# Altium PCB PCB1.pcbdoc (part 1 of 2)
Units mil, origin at the board's own origin, x right, y up, seen from the top; angles counter-clockwise.
Board outline 2780 x 2060 mil, 2 copper layers (Top Layer, Bottom Layer); 80 components, 64 nets, 301 pads, 176 vias.
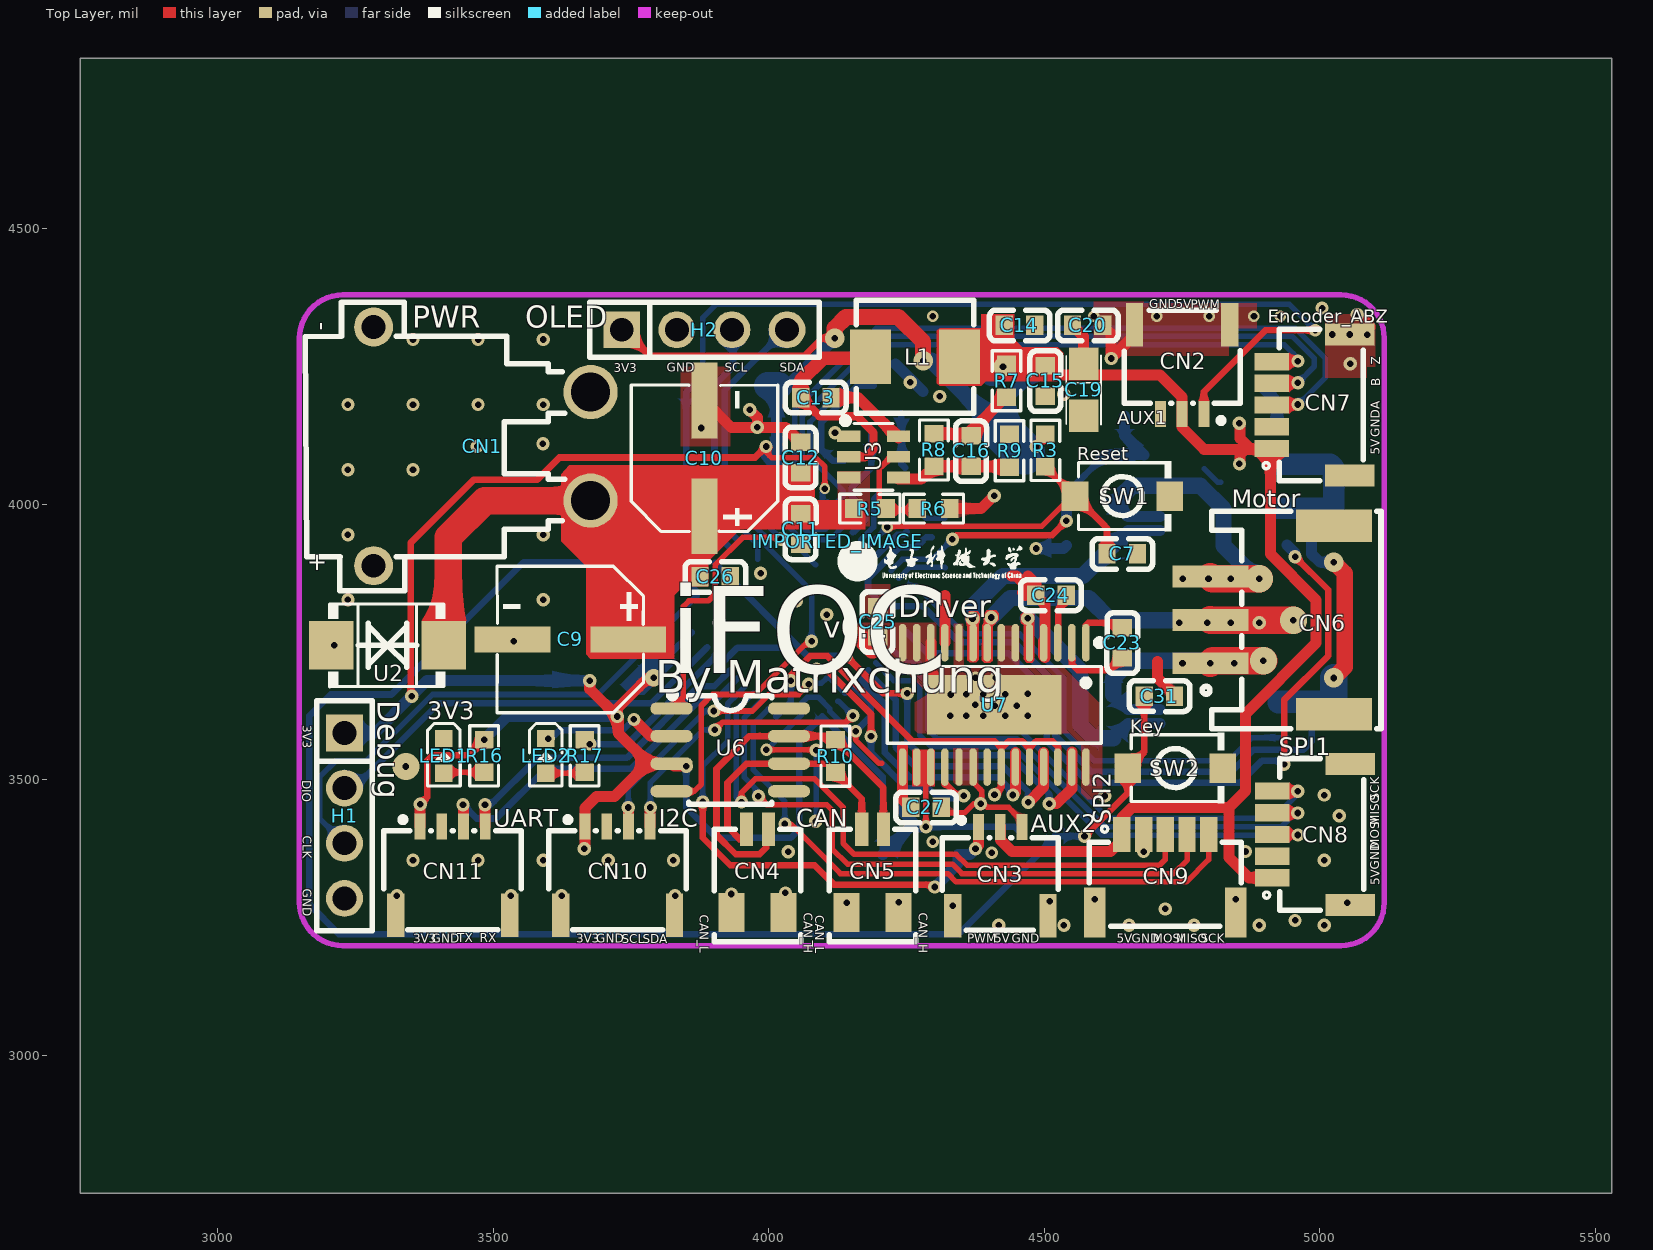
[diagram p0: Top Layer view]
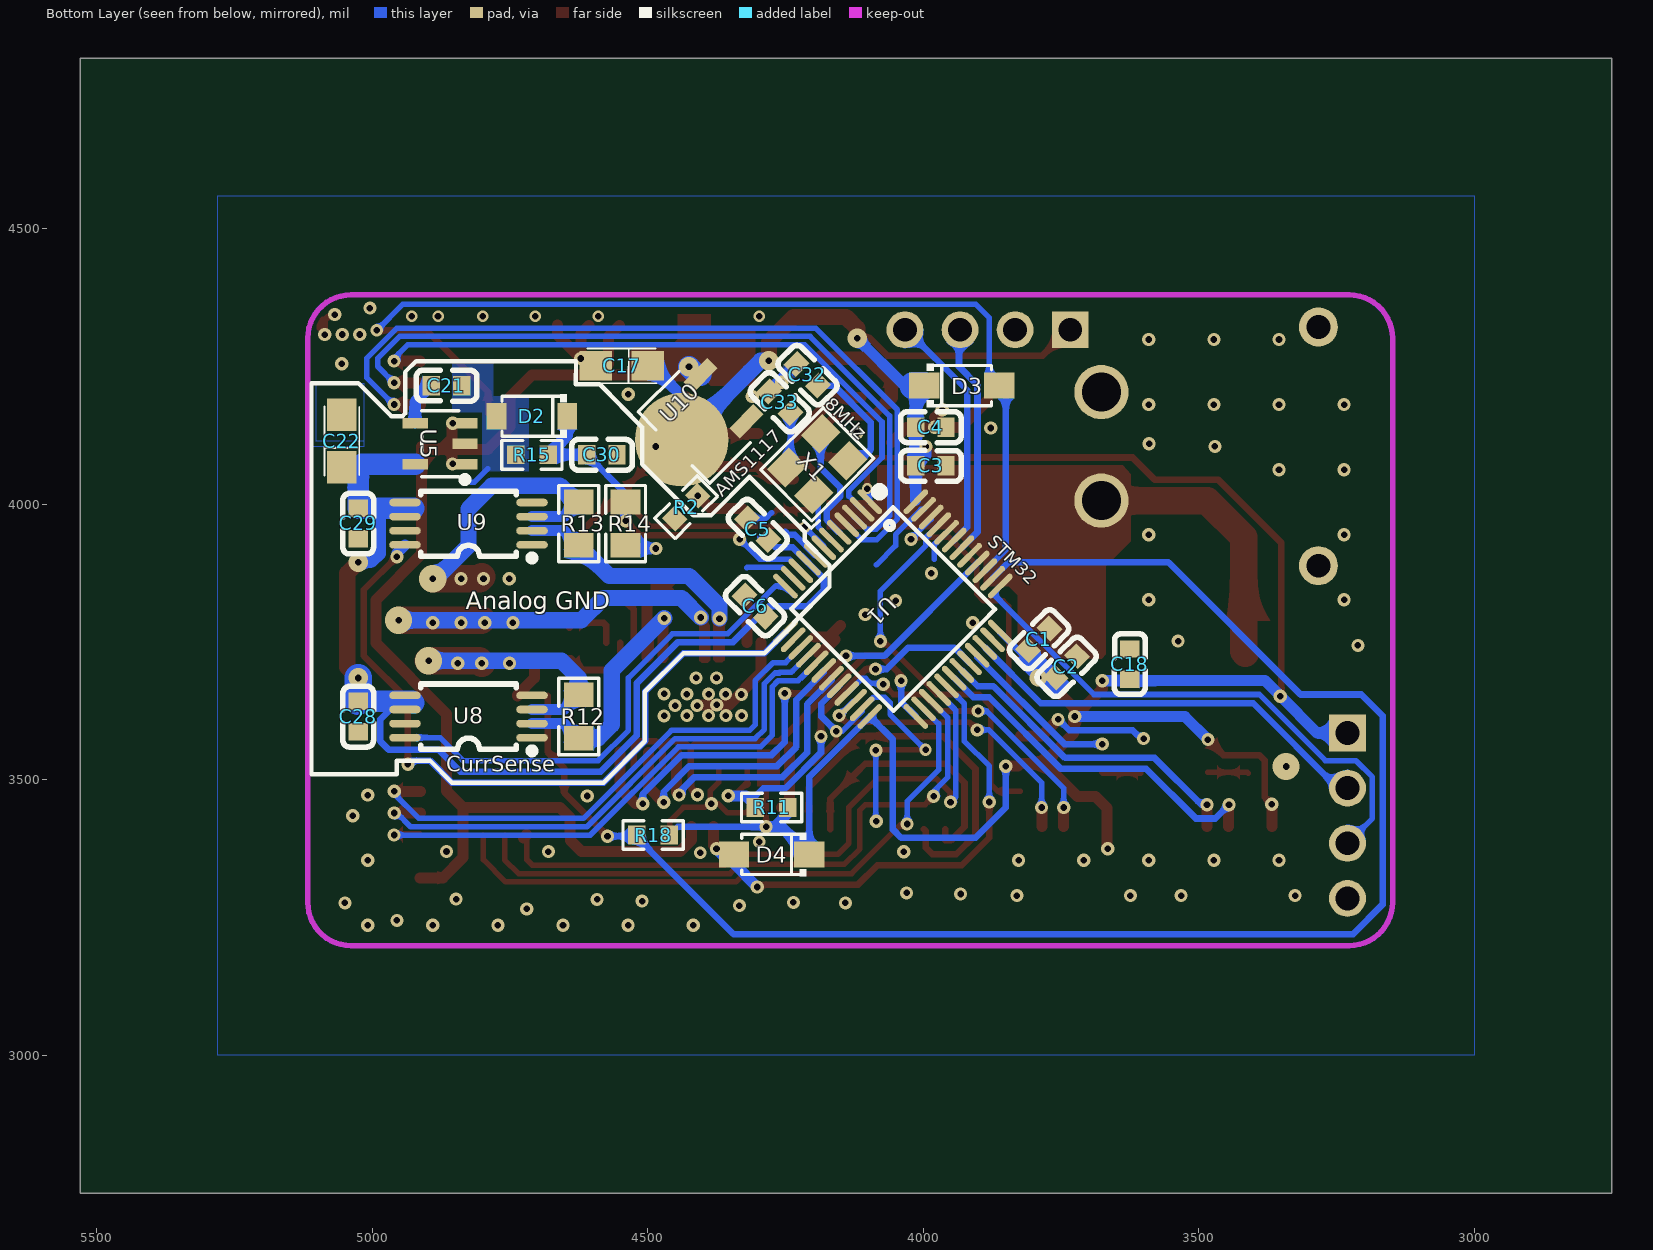
[diagram p1: Bottom Layer view, seen from below]

## Layer stack, top to bottom
Top Layer: signal copper (thickness not stored)
Dielectric: dielectric 12.6, FR-4, Dk 4.8
Bottom Layer: signal copper (thickness not stored)

## Board outline
5530,2750 2750,2750 2750,4810 5530,4810

## Components (designator, comment, footprint, x,y, rotation, side; value= is the part's Value field where it differs from the comment)
C1 "CAP_0603" C0603 3790,3755 r315 bottom
C2 "CAP_0603" C0603 3740,3705 r315 bottom
C3 "CAP_0603" C0603 3986.17,4069.93 r0 bottom
C4 "CAP_0603" C0603 3986.17,4140.13 r0 bottom
C5 "CAP_0603" C0603 4300,3955 r225 bottom
C6 "CAP_0603" C0603 4305,3815 r225 bottom
C7 "CAP_0603" C0603 4641.27,3910 r180 top
C9 "EEEFK1V470P" CAP-SMD_BD6.3-L6.6-W6.6-LS7.6-FD 3639.72,3754.97 r180 top
C10 "EEEFK1V470P" CAP-SMD_BD6.3-L6.6-W6.6-LS7.6-FD 3883.02,4083.56 r90 top
C11 "CAP_0603" C0603 4057.69,3955.26 r90 top
C12 "CAP_0603" C0603 4057.48,4084.89 r270 top
C13 "CAP_0603" C0603 4085.29,4193.87 r0 top
C14 "CAP_0603" C0603 4454.74,4324.69 r180 top
C15 "CAP_0603" C0603 4501.72,4224 r90 top
C16 "CAP_0603" C0603 4367.06,4096.93 r90 top
C17 "TAJA106K010RNJ" CASE-A_3216 4547.08,4251.4 r0 bottom
C18 "CAP_0603" C0603 3625,3710 r270 bottom
C19 "TAJA106K010RNJ" CASE-A_3216 4571.22,4207.76 r270 top
C20 "CAP_0603" C0603 4578.62,4324.69 r180 top
C21 "CAP_0603" C0603 4865,4215.56 r0 bottom
C22 "TAJA105K016RNJ" CASE-A_3216 5055,4115 r90 bottom
C23 "0603B103K101NT" C0603 4641.69,3748.67 r90 top
C24 "CAP_0603" C0603 4512,3835 r0 top
C25 "CAP_0603" C0603 4197.2,3786.86 r90 top
C26 "CAP_0603" C0603 3902.71,3868.35 r180 top
C27 "CAP_0603" C0603 4285,3450 r180 top
C28 "CAP_0603" C0603 5025,3615 r90 bottom
C29 "CAP_0603" C0603 5025,3965.3 r90 bottom
C30 "CAP_0603" C0603 4583.02,4090.11 r0 bottom
C31 "CAP_0603" C0603 4708.61,3652.21 r180 top
C32 "CAP_0603" C0603 4210,4235 r45 bottom
C33 "CAP_0603" C0603 4260,4185 r225 bottom
CN1 "XT30PW-M" CONN-TH_XT30PW-M 3479.66,4105.26 r270 top
CN2 "HDGC1002WR-S-3P" CONN-SMD_3P-P1.00_HDGC_HDGC1002WR-S-3P 4750,4245 r180 top
CN3 "HDGC1002WR-S-3P" CONN-SMD_3P-P1.00_HDGC_HDGC1002WR-S-3P 4420.03,3333.93 r0 top
CN4 "A1002WR-S-2P" CONN-SMD_A1002WR-S-2P 3979.34,3335 r0 top
CN5 "A1002WR-S-2P" CONN-SMD_A1002WR-S-2P 4188.21,3335 r0 top
CN6 "ZX-PH2.0-WT3P" CONN-SMD_3P-P2.00_ZX-PH2.0-WT3P 4913.27,3790.26 r90 top
CN7 "ZX-SH1.0-5PWT" CONN-SMD_5P-P1.00_SHOU-HAN_1.0-5P-WT 4983.27,4180.26 r90 top
CN8 "ZX-SH1.0-5PWT" CONN-SMD_5P-P1.00_SHOU-HAN_1.0-5P-WT 4984.1,3401.07 r90 top
CN9 "ZX-SH1.0-5PWT" CONN-SMD_5P-P1.00_SHOU-HAN_1.0-5P-WT 4719.36,3330 r0 top
CN10 "HDGC1002WR-S-4P" CONN-SMD_4P-P1.00_HDGC_HDGC1002WR-S-4P 3725.56,3335 r0 top
CN11 "HDGC1002WR-S-4P" CONN-SMD_4P-P1.00_HDGC_HDGC1002WR-S-4P 3426.19,3335 r0 top
D2 "BZT52C3V3_C173413" SOD-123_L2.7-W1.6-LS3.7-RD 4710,4160 r0 bottom
D3 "1N4007_C727082" SOD-123FL_L2.7-W1.8-LS3.8-RD 3930,4215.45 r180 bottom
D4 "1N4007_C727082" SOD-123FL_L2.7-W1.8-LS3.8-RD 4275,3365 r0 bottom
H1 "PM254V-11-04-H85" HDR-TH_4P-P2.54-V-F 3230,3435 r270 top
H2 "PM254V-11-04-H85" HDR-TH_4P-P2.54-V-F 3883.02,4316.78 r0 top
IMPORTED_IMAGE "IMPORTED_IMAGE" IMPORTED_IMAGE 4124.76,3932.92 r0 top
L1 "FXL0530-100-M" IND-SMD_L5.4-W5.2_FXL0530 4265.25,4268.04 r0 top
LED1 "NCD0603B1" LED0603-RD 3410,3543.69 r270 top
LED2 "NCD0603R1_C84263" LED0603-RD_RED 3595,3543.69 r270 top
R2 "Res_0603" R0603 4430,3995 r315 bottom
R3 "Res_0603" R0603 4501.61,4097.88 r270 top
R5 "Res_0603" R0603 4183.32,3992.37 r180 top
R6 "Res_0603" R0603 4298.77,3992.37 r180 top
R7 "Res_0603" R0603 4431.32,4224.27 r90 top
R8 "Res_0603" R0603 4299.47,4098.72 r90 top
R9 "Res_0603" R0603 4436.77,4097.15 r270 top
R10 "Res_0603" R0603 4120.77,3543.31 r270 top
R11 "Res_0603" R0603 4275,3450 r180 bottom
R12 "0805W4F100MT5E" R0805 4625,3615 r270 bottom
R13 "0805W4F100MT5E" R0805 4625,3965 r270 bottom
R14 "HoLTT0805-1/8W-100K-5%" R0805 4540,3965 r270 bottom
R15 "HoLTT0603-1/10W-10K-1%" R0603 4710,4090 r180 bottom
R16 "Res_0603" R0603 3483.46,3543.49 r270 top
R17 "Res_0603" R0603 3665.78,3543.49 r270 top
R18 "Res_0603" R0603 4490,3400 r0 bottom
SW1 "TS-1088-AR02016" SW-SMD_L3.9-W3.0-P4.45 4641.58,4015 r0 top
SW2 "TS-1088-AR02016" SW-SMD_L3.9-W3.0-P4.45 4737.4,3521.5 r0 top
U1 "STM32F103CBT6" LQFP-48_L7.0-W7.0-P0.50-LS9.0-BL 4055,3810 r315 bottom
U2 "SMBJ24CA_C3001981" SMB_L4.3-W3.6-LS5.4-BI 3308.22,3744.31 r180 top
U3 "TPS54302DDCR" SOT-23-6_L2.9-W1.6-P0.95-LS2.8-BL 4190.11,4086.17 r270 top
U5 "SPX3819M5-L-3-3/TR" SOT-23-5_L3.0-W1.7-P0.95-LS2.8-BL 4876.49,4110 r90 bottom
U6 "SN65HVD232DR" SOIC-8_L5.0-W4.0-P1.27-LS6.0-BL 3930,3554.49 r270 top
U7 "DRV8313PWPR" HTSSOP-28_L9.8-W4.5-P0.65-LS6.6-BL-EP 4409.01,3636.19 r180 top
U8 "INA240A2PWR" TSSOP-8_L4.4-W3.0-P0.65-LS6.4-BL 4825,3615 r90 bottom
U9 "INA240A2PWR" TSSOP-8_L4.4-W3.0-P0.65-LS6.4-BL 4825,3965 r90 bottom
U10 "AMS1117-3.3_C347256" SOT-89_L4.5-W2.5-P1.50-LS4.2-BR 4400,4155 r135 bottom
X1 "TAXM8M4RDBCCT2T" OSC-SMD_4P-L3.2-W2.5-BL 4192.08,4073.08 r135 bottom

## Footprints (in the part's own frame and the unit in brackets; to place one, negate y for a bottom-side part, rotate by r counter-clockwise, add the part's x,y. Pads: shape width x height; smd on the part's side, far side on the other; paste and mask are expansions set on the pad)
C0603 [mm]
  rect 0.8x0.9 smd: 1(-0.7,0) 2(0.7,0)
  silkscreen extent -1.41,-0.71 1.39,0.72
CAP-SMD_BD6.3-L6.6-W6.6-LS7.6-FD [mm]
  rect 3.5x1.2 smd: 1(-2.67,0) 2(2.67,0)
  silkscreen extent -3.38,-3.38 3.38,3.38
CASE-A_3216 [mil]
  rect 59.05x53.5 smd: 1(-47.24,0) 2(47.24,0)
  silkscreen extent -63,-32 63,32
CONN-SMD_3P-P1.00_HDGC_HDGC1002WR-S-3P [mm]
  rect 0.5x1.2 smd: 1(-1,2.05) 2(0,2.05) 3(1,2.05)
  rect 0.8x2 smd: 4(2.2,-2.05) 5(-2.2,-2.05)
  silkscreen extent -2.67,-2.72 2.67,2.48
CONN-SMD_3P-P2.00_ZX-PH2.0-WT3P [mm]
  rect 1x3.5 smd: 1(-2,2.85) 2(0,2.85) 3(2,2.85)
  rect 1.5x3.5 smd: 4(4.35,-2.85) 5(-4.35,-2.85)
  silkscreen extent -5.02,-5.02 5.02,3.23
CONN-SMD_4P-P1.00_HDGC_HDGC1002WR-S-4P [mm]
  rect 0.5x1.2 smd: 1(-1.5,2.05) 2(-0.5,2.05) 3(0.5,2.05) 4(1.5,2.05)
  rect 0.8x2 smd: 5(2.625,-2.05) 6(-2.625,-2.05)
  silkscreen extent -3.18,-2.72 3.17,2.48
CONN-SMD_5P-P1.00_SHOU-HAN_1.0-5P-WT [mm]
  rect 0.8x1.6 smd: 1(-2,1.8) 2(-1,1.8) 3(0,1.8) 4(1,1.8) 5(2,1.8)
  rect 1x2.3 smd: 6(3.25,-1.8) 7(-3.25,-1.8)
  silkscreen extent -3.5,-2.43 3.5,2.2
CONN-SMD_A1002WR-S-2P [mm]
  rect 0.6x1.55 smd: 1(-0.498,1.924) 2(0.501,1.924)
  rect 1.2x1.8 smd: 3(1.201,-1.924) 4(-1.201,-1.924)
  silkscreen extent -2,-3.27 2,1.92
CONN-TH_XT30PW-M [mm]
  round 2.5 hole 1.8: 1(-2.5,5) 2(2.5,5)
  round 1.8 hole 1.1: 3(5.5,-5) 4(-5.5,-5)
  silkscreen extent -6.65,-8.15 6.65,3.81
HDR-TH_4P-P2.54-V-F [mm]
  rect 1.7x1.7 hole 1.1: 1(-3.81,0)
  round 1.7 hole 1.1: 2(-1.27,0) 3(1.27,0) 4(3.81,0)
  silkscreen extent -5.29,-1.27 5.29,1.27
HTSSOP-28_L9.8-W4.5-P0.65-LS6.6-BL-EP [mm]
  oval 0.343x1.731 smd: 1(-4.225,-2.866) 2(-3.575,-2.866) 3(-2.925,-2.866) 4(-2.275,-2.866) 5(-1.625,-2.866) 6(-0.975,-2.866) 7(-0.325,-2.866) 8(0.325,-2.866) 9(0.975,-2.866) 10(1.625,-2.866) 11(2.275,-2.866) 12(2.925,-2.866) 13(3.575,-2.866) 14(4.225,-2.866) 15(4.225,2.866) 16(3.575,2.866) 17(2.925,2.866) 18(2.275,2.866) 19(1.625,2.866) 20(0.975,2.866) 21(0.325,2.866) 22(-0.325,2.866) 23(-0.975,2.866) 24(-1.625,2.866) 25(-2.275,2.866) 26(-2.925,2.866) 27(-3.575,2.866) 28(-4.225,2.866)
  rect 6.2x2.75 smd: 29(0,0)
  silkscreen extent -5,-3.02 4.93,1.77
IMPORTED_IMAGE [mil]
  silkscreen extent 0,-72 335,0
IND-SMD_L5.4-W5.2_FXL0530 [mm]
  rect 1.9x2.5 smd: 1(-2.05,0) 2(2.05,0)
  silkscreen extent -2.7,-2.6 2.7,2.6
LED0603-RD [mm]
  rect 0.8x0.8 smd: 1(-0.799,-0.003) 2(0.799,0.003)
  silkscreen extent -1.49,-0.75 1.39,0.76
LED0603-RD_RED [mm]
  rect 0.8x0.8 smd: 1(-0.8,-0.003) 2(0.8,0.003)
  silkscreen extent -1.49,-0.75 1.39,0.76
LQFP-48_L7.0-W7.0-P0.50-LS9.0-BL [mm]
  oval 0.27x1.5 smd: 1(-2.75,-4.25) 2(-2.25,-4.25) 3(-1.75,-4.25) 4(-1.25,-4.25) 5(-0.75,-4.25) 6(-0.25,-4.25) 7(0.25,-4.25) 8(0.75,-4.25) 9(1.25,-4.25) 10(1.75,-4.25) 11(2.25,-4.25) 12(2.75,-4.25) 25(2.75,4.25) 26(2.25,4.25) 27(1.75,4.25) 28(1.25,4.25) 29(0.75,4.25) 30(0.25,4.25) 31(-0.25,4.25) 32(-0.75,4.25) 33(-1.25,4.25) 34(-1.75,4.25) 35(-2.25,4.25) 36(-2.75,4.25)
  oval 1.5x0.27 smd: 13(4.25,-2.75) 14(4.25,-2.25) 15(4.25,-1.75) 16(4.25,-1.25) 17(4.25,-0.75) 18(4.25,-0.25) 19(4.25,0.25) 20(4.25,0.75) 21(4.25,1.25) 22(4.25,1.75) 23(4.25,2.25) 24(4.25,2.75) 37(-4.25,2.75) 38(-4.25,2.25) 39(-4.25,1.75) 40(-4.25,1.25) 41(-4.25,0.75) 42(-4.25,0.25) 43(-4.25,-0.25) 44(-4.25,-0.75) 45(-4.25,-1.25) 46(-4.25,-1.75) 47(-4.25,-2.25) 48(-4.25,-2.75)
  silkscreen extent -3.59,-4.46 3.3,3.34
OSC-SMD_4P-L3.2-W2.5-BL [mm]
  rect 1.4x1.2 smd: 1(-1.1,-0.875) 2(1.1,-0.875) 3(1.1,0.875) 4(-1.1,0.875)
  silkscreen extent -2.29,-1.9 2.03,1.65
R0603 [mil]
  rect 31.75x34.02 smd: 1(-29.66,0) 2(29.66,0)
  silkscreen extent -55,-26 55,26
R0805 [mm]
  rect 1.133x1.377 smd: 1(-1,0) 2(1,0)
  silkscreen extent -1.76,-0.92 1.76,0.92
SMB_L4.3-W3.6-LS5.4-BI [mil]
  rect 80.61x88.23 smd: 1(-102.02,0) 2(102.02,0)
  silkscreen extent -105,-75 108,75
SOD-123_L2.7-W1.6-LS3.7-RD [mm]
  rect 0.91x1.22 smd: 1(-1.635,0) 2(1.635,0)
  silkscreen extent -1.6,-1 1.38,1
SOD-123FL_L2.7-W1.8-LS3.8-RD [mm]
  rect 1.4x1.2 smd: 1(-1.735,0) 2(1.735,0)
  silkscreen extent -1.6,-1 1.38,1
SOIC-8_L5.0-W4.0-P1.27-LS6.0-BL [mil]
  oval 22.38x76.78 smd: 1(-75,-106.5) 2(-25,-106.5) 3(25,-106.5) 4(75,-106.5) 5(75,106.5) 6(25,106.5) 7(-25,106.5) 8(-75,106.5)
  silkscreen extent -106,-111 98,75
SOT-23-5_L3.0-W1.7-P0.95-LS2.8-BL [mm]
  rect 0.49x1.157 smd: 1(-0.95,-1.154) 2(0,-1.154) 3(0.95,-1.154)
  rect 0.49x1.175 smd: 4(0.95,1.154) 5(-0.95,1.154)
  silkscreen extent -1.8,-1.29 1.53,0.85
SOT-23-6_L2.9-W1.6-P0.95-LS2.8-BL [mil]
  rect 20.95x42.2 smd: 1(-37.4,-45.24) 2(0,-45.24) 3(37.4,-45.24) 4(37.4,45.24) 5(0,45.24) 6(-37.4,45.24)
  silkscreen extent -72,-57 61,35
SOT-89_L4.5-W2.5-P1.50-LS4.2-BR [mm]
  rect 1.575x0.672 smd: 1(1.356,-1.5) 3(1.356,1.5)
  round 4.314 smd: 2(-1.356,0.009)
  Top Layer region: -2.283,0.959 -0.429,0.959 -0.385,0.958 -0.34,0.955 -0.296,0.949 -0.252,0.942 -0.208,0.933 -0.165,0.921 -0.123,0.908 -0.081,0.893 -0.04,0.875 0,0.856 0.04,0.835 0.078,0.812 0.115,0.788 0.151,0.761 0.185,0.733 0.219,0.704 0.251,0.673 0.281,0.64 0.31,0.606 0.337,0.571 0.362,0.534 0.386,0.497 0.408,0.458 0.428,0.418 0.447,0.339 2.144,0.339 2.144,-0.321 0.447,-0.321 0.428,-0.401 0.408,-0.44 0.386,-0.479 0.362,-0.517 0.337,-0.553 0.31,-0.588 0.281,-0.622 0.251,-0.655 0.219,-0.686 0.185,-0.716 0.151,-0.744 0.115,-0.77 0.078,-0.795 0.04,-0.818 0,-0.839 -0.04,-0.858 -0.081,-0.875 -0.123,-0.89 -0.165,-0.904 -0.208,-0.915 -0.252,-0.925 -0.296,-0.932 -0.34,-0.937 -0.385,-0.94 -0.429,-0.941 -2.283,-0.941 -2.328,-0.94 -2.372,-0.937 -2.416,-0.932 -2.46,-0.925 -2.504,-0.915 -2.547,-0.904 -2.589,-0.89 -2.631,-0.875 -2.672,-0.858 -2.713,-0.839 -2.752,-0.818 -2.79,-0.795 -2.827,-0.77 -2.863,-0.744 -2.898,-0.716 -2.931,-0.686 -2.963,-0.655 -2.993,-0.622 -3.022,-0.588 -3.049,-0.553 -3.075,-0.517 -3.098,-0.479 -3.12,-0.44 -3.141,-0.401 -3.159,-0.36 -3.175,-0.318 -3.189,-0.276 -3.202,-0.233 -3.212,-0.19 -3.22,-0.146 -3.227,-0.102 -3.231,-0.058 -3.233,-0.013 -3.233,0.031 -3.231,0.076 -3.227,0.12 -3.22,0.164 -3.212,0.208 -3.202,0.251 -3.189,0.294 -3.175,0.336 -3.159,0.377 -3.141,0.418 -3.12,0.458 -3.098,0.497 -3.075,0.534 -3.049,0.571 -3.022,0.606 -2.993,0.64 -2.963,0.673 -2.931,0.704 -2.898,0.733 -2.863,0.761 -2.827,0.788 -2.79,0.812 -2.752,0.835 -2.713,0.856 -2.672,0.875 -2.631,0.893 -2.589,0.908 -2.547,0.921 -2.504,0.933 -2.46,0.942 -2.416,0.949 -2.372,0.955 -2.328,0.958
  silkscreen extent -1.87,-2.33 0.78,2.33
SW-SMD_L3.9-W3.0-P4.45 [mm]
  rect 1.23x1.36 smd: 1(-2.185,0) 2(2.185,0)
  silkscreen extent -2.03,-1.62 2.25,1.62
TSSOP-8_L4.4-W3.0-P0.65-LS6.4-BL [mil]
  oval 13.9x57.24 smd: 1(-38.39,-115.24) 2(-12.79,-115.24) 3(12.8,-115.24) 4(38.39,-115.24) 5(38.39,115.24) 6(12.8,115.24) 7(-12.79,115.24) 8(-38.39,115.24)
  silkscreen extent -68,-121 59,87

## Via types
v1: diameter 24.02, hole 12.01, Top Layer to Bottom Layer, 87 vias
v2: diameter 23.62, hole 11.81, Top Layer to Bottom Layer, 34 vias
v3: diameter 24.02, hole 11.97, Top Layer to Bottom Layer, 26 vias
v4: diameter 20.87, hole 12.01, Top Layer to Bottom Layer, 7 vias
v5: diameter 35.43, hole 12.01, Top Layer to Bottom Layer, 5 vias
v6: diameter 25, hole 12.01, Top Layer to Bottom Layer, 3 vias
v7: diameter 49.37, hole 11.81, Top Layer to Bottom Layer, 3 vias
v8: diameter 22.83, hole 12.01, Top Layer to Bottom Layer, 3 vias
v9: diameter 22.44, hole 12.01, Top Layer to Bottom Layer, 2 vias
v10: diameter 24.02, hole 11.81, Top Layer to Bottom Layer, 1 vias
v11: diameter 49.21, hole 12.01, Top Layer to Bottom Layer, 1 vias
v12: diameter 31.5, hole 12.01, Top Layer to Bottom Layer, 1 vias
v13: diameter 23.62, hole 12.01, Top Layer to Bottom Layer, 1 vias
v14: diameter 19.68, hole 12.01, Top Layer to Bottom Layer, 1 vias
v15: diameter 24.41, hole 12.01, Top Layer to Bottom Layer, 1 vias

## Nets (pads, with @x,y where several pads share a name; then routed paths per layer and width w, separated by ;. In a path a pad name is that pad's centre, name@x,y a point inside that pad or via, vN(x,y) a via of type N, cw(c..) or ccw(c..) an arc to the next point about the centre after c; other vN are vias at no path point)
3V3: C1.2 C2.2 C3.2 C4.2 C17.1 C18.2 CN10.1 CN11.1 D3.1 D4.1 H1.1 H2.1 R3.1 R11.2 R16.1 R18.1 U1.1 U1.24 U1.36 U1.48 U6.3 U7.16 U7.17 U10.2 | length 5684.5
  Top Layer w10: v1@3995,4095 4005,4085 4085,4085 4101.53,4068.47 v14(4101.53,4028.59) ; v1@3995,4100 v1(3995,4105) ; U7.16@4268.26,3523.36 4285,3506.62 ; v1(4285,3415) 4285,3506.62 ; U7.17@4293.85,3523.36 4285,3514.51 4285,3506.62 ; v1(4485,4105) 4501.61,4121.61 R3.1@4501.61,4127.54
  Top Layer w12: v1@3350,3650 3350,3930 3465,4045 3580,4045 3620,4085 3975,4085 v1(3995,4105) ; v1(3367.28,3455.75) 3380.15,3468.63 3380.15,3535.15 3390,3545 3455.31,3545 v2(3483.46,3573.15) ; H2.1@3733.27,4320.26 3783.53,4270 4065,4270 4096.42,4301.42 v5(4119.64,4301.42)
  Top Layer w20: CN11.1@3367.13,3415.7 3367.13,3455.61 v1(3367.28,3455.75) ; v1(3665,3375) 3666.5,3376.5 CN10.1@3666.5,3415.7 3666.5,3449.33 3687.18,3470 3720,3470 3779.49,3529.49 ; v1(3675,3680) 3675,3665 v1(3725,3615) ; v12(3791.29,3685.28) 3780.28,3685.28 3725,3630 v1(3725,3615) ; v1(3850,3525) 3827.99,3525 U6.3@3823.5,3529.49 3779.49,3529.49 ; v1(3725,3615) 3727.19,3612.81 3727.19,3584.53 3779.49,3532.23 3779.49,3529.49
  Top Layer w29.53: v5(4119.64,4301.42) 4119.64,4319.64 4140,4340 4235,4340 4279.87,4295.13 v5(4279.87,4260.48)
  Bottom Layer w10: U1.1@4096.75,4004.87 4096.75,4023.81 v14(4101.53,4028.59)
  Bottom Layer w12: C2.2@3749.49,3675.51 3799.49,3725.51 3818.14,3725.51 3860.13,3767.5 U1.36@3860.13,3768.25 ; v1(3850,3525) 3850,3450 3905,3395 4040,3395 4055,3410 4055,3573.37 U1.24@4096.75,3615.13 4206.69,3505.19 D4.1@4206.69,3365 ; v1(4285,3415) 4445.34,3415 R18.1@4460.34,3400
  Bottom Layer w20: H1.1@3230,3585 3285,3585 v1(3351.89,3651.89) 3380,3680 v1(3675,3680) ; v2(3483.46,3573.15) 3525.31,3615 v1(3725,3615) ; v1(3995,4105) 3995,4088.66 C3.2@4013.73,4069.93 ; D3.1@3998.31,4215.45 4013.73,4200.02 C4.2@4013.73,4140.13 C3.2@4013.73,4069.93 ; U1.48@4013.73,4007.31 C3.2@4013.73,4069.93 ; D3.1@4017.57,4215.45 4033.67,4215.45 v5(4119.64,4301.42) ; D4.1@4206.69,3365 4256.69,3415 4270,3415 ; R11.2@4245.34,3450 4245.34,3439.66 4270,3415 ; v1(4285,3415) 4270,3415 ; U10.2@4438,4117.48 4438,4196.97 C17.1@4495.51,4254.49
  Bottom Layer w29.53: v5(4279.87,4260.48) 4295,4260.48 U10.2@4438,4117.48
  Bottom Layer w50: D3.1@3998.31,4215.45 D3.1@4017.57,4215.45
$1N506: U1.14
$1N587: U1.41
$1N3797: C13.2 U3.6 | length 152.7
  Top Layer w20: C13.2@4112.85,4193.87 4162,4193.87 U3.6@4235.24,4120.63
$1N4136: C16.2 R7.1 R8.2 | length 164.8
  Top Layer w20: R8.2@4299.47,4128.38 C16.2@4363.17,4128.38 ; C16.2@4367.06,4124.49 C16.2@4363.17,4128.38 ; R7.1@4431.32,4194.61 4429.41,4194.61 C16.2@4363.17,4128.38
$1N4196: C16.1 R8.1 R9.2 U3.4 | length 212.2
  Top Layer w20: U3.4@4235.24,4045.83 4276.25,4045.83 R8.1@4299.47,4069.06 C16.1@4366.75,4069.06 ; C16.1@4367.06,4069.37 C16.1@4366.75,4069.06 ; R9.2@4436.77,4067.49 4435.2,4069.06 C16.1@4366.75,4069.06
$1N5221: C21.2 U5.4 | length 80.3
  Bottom Layer w20: C21.2@4892.56,4215.56 4921.91,4186.21 U5.4@4921.91,4147.4
$1N7020: C23.1 U7.2 | length 144.2
  Top Layer w12: U7.2@4549.76,3749.01 4550,3748.77 4550,3710 4560.64,3699.36 4617.97,3699.36 4639.72,3721.11 C23.1@4641.69,3721.11
$1N7023: C23.2 U7.1 | length 103.2
  Top Layer w12: U7.1@4575.35,3749.01 4575.35,3780.35 4580,3785 4632.91,3785 C23.2@4641.69,3776.23
$1N7264: C24.2 U7.3 | length 92.4
  Top Layer w12: U7.3@4524.17,3749.01 4525,3749.84 4525,3810 4539.56,3824.56 C24.2@4539.56,3835
$1N7569: C27.2 U7.15 | length 116.1
  Top Layer w20: 4242.67,3560 U7.15@4242.67,3523.36 4242.67,3464.77 C27.2@4257.44,3450
$1N11754: LED1.2 R16.2 | length 74
  Top Layer w10: LED1.2@3410.14,3512.21 3411.75,3513.83 R16.2@3483.46,3513.83
$1N11757: LED2.2 R17.2 | length 71.3
  Top Layer w10: LED2.2@3605.14,3512.21 3674.16,3512.21 R17.2@3675.78,3513.83
$1N17667: C33.2 X1.4 | length 101.4
  Bottom Layer w12: C33.2@4240.51,4165.51 4240.51,4073.36 X1.4@4247.06,4066.81
$1N17673: C32.1 X1.2 | length 222.6
  Bottom Layer w12: X1.2@4137.1,4079.34 4115.66,4079.34 4095,4100 4095,4148.79 4161.73,4215.51 C32.1@4190.51,4215.51
+5V: C14.2 C15.2 C19.1 C20.2 CN2.2 CN3.2 CN7.1 CN8.1 CN9.1 L1.2 R7.2 U5.1 U5.3 U10.3 | length 2141.3
  Top Layer w20: CN3.2@4420,3415.7 4420,3390.72 4440.85,3369.87 4620,3369.87 4640,3389.87 4640,3400.25 CN9.1@4640.62,3400.86 4640.62,3431.77 4658.85,3450 4835,3450 ; C15.2@4501.72,4251.56 4518.28,4235 4710,4235 4750,4195 CN2.2@4750,4164.3 4750,4140 4790,4100 4865,4100 ; C20.2@4551.06,4324.69 4571.22,4304.54 C19.1@4571.22,4255 ; v1(4853.5,4147.09) 4855,4145.59 4855,4120 4875,4100 ; v1(4853.89,4073.47) 4855,4074.58 4855,4090 4865,4100 ; CN7.1@4910,4105 CN7.1@4910,4100 ; CN8.1@4913.24,3322.33 4871.74,3322.33 4835,3359.07 4835,3450 ; 4835,3450 4865,3480 4865,3620 4993.26,3748.26 4993.26,3826.74 4910,3910 CN7.1@4910,4100 ; 4865,4100 4875,4100 ; 4875,4100 CN7.1@4910,4100
  Bottom Layer w39.37: U10.3@4404.01,4234.52 4409.52,4234.52 v5(4425,4250)
AGND: C5.1 C6.1 C21.1 C22.2 C28.1 C29.1 C30.1 D2.2 R2.2 R15.1 U1.8 U1.11 U5.2 U8.1 U8.4 U8.7 U9.1 U9.4 U9.7 | length 255.5
  Bottom Layer w10: U1.11@4235.95,3865.68 4256.26,3885.98 4319.02,3885.98 4320,3885 ; 4275,3985 4285.51,3974.49 C5.1@4319.49,3974.49 ; 4790,4065 4815,4040 4820,4040
  Bottom Layer w12.01: U1.8@4194.19,3907.43 4195.45,3907.43 4233.02,3945 4245,3945 4250,3950
AVCC: C5.2 C6.2 C22.1 C28.2 C29.2 U1.9 U5.5 U8.5 U8.6 U9.5 U9.6 | length 2053
  Top Layer w29.53: v5(5025,3685) 5045,3705 5045,3875 v5(5025,3895)
  Bottom Layer w12: U1.9@4208.11,3893.52 4236.55,3921.95 4266.95,3921.95 C5.2@4280.51,3935.51
  Bottom Layer w12.01: U1.9@4208.11,3893.52 4208.11,3893.11 4180,3865 4180,3845 4210,3815 4280,3815 4345,3750 4445,3750 4520,3675 4520,3580 4585,3515 4840,3515 4880,3555 4970,3555 4985,3570 4985,3610 4967.2,3627.8 U8.6@4940.24,3627.8 ; C5.2@4285.51,3940.51 C5.2@4295.51,3940.51
  Bottom Layer w20: 4978.8,3992.86 4985,3986.66 4985,3910 5000,3895 v5(5025,3895)
  Bottom Layer w39.37: U5.5@4921.91,4072.6 5018.66,4072.6 5025,4066.26 C29.2@5025,3992.86 4978.8,3992.86 4925,3992.86 ; 4925,3640 4927.56,3642.56 C28.2@5025,3642.56
  Bottom Layer w50: C28.2@5025,3642.56 v5(5025,3685)
CAN_H: CN4.2 CN5.2 R10.1 U6.7 | length 706.3
  Top Layer w12: CN4.2@3999.07,3410.76 3995,3406.69 3995,3377 3983,3365 3940,3365 3905,3400 3905,3520 3964.49,3579.49 U6.7@4036.5,3579.49 4114.25,3579.49 R10.1@4120.77,3572.97 4207.94,3485.8 CN5.2@4207.94,3410.76
CAN_L: CN4.1 CN5.1 R10.2 U6.6 | length 484.7
  Top Layer w12: CN4.1@3959.71,3410.76 3959.71,3390.29 3949.71,3390.29 3925,3415 3925,3495 3959.49,3529.49 U6.6@4036.5,3529.49 4104.93,3529.49 R10.2@4120.77,3513.65 4168.58,3465.84 CN5.1@4168.58,3410.76
CAN_RX: U1.45 U6.4 | length 705.6
  Top Layer w10: U6.4@3823.5,3479.49 3865,3479.49 3877.34,3491.83 3877.34,3634.57 3897.77,3655 3975,3655 4071.82,3751.82 v1(4077.51,3751.82)
  Bottom Layer w10: U1.45@3971.48,3963.11 3995,3939.59 3995,3925 4077.51,3842.49 v1(4077.51,3751.82)
CAN_TX: U1.46 U6.1 | length 510.5
  Top Layer w10: U6.1@3823.5,3629.49 3845,3650.99 3845,3815 3855,3825 3890,3825 3902.65,3837.65 3902.65,3890 3952.65,3940 4018.86,3940 v1(4022,3936.86)
  Bottom Layer w10: U1.46@3985.41,3977.03 3985.41,3973.45 v1(4022,3936.86)
DRV_EN: U1.25 U7.22 U7.24 U7.26 | length 836.4
  Top Layer w12: v1(4040,3680) 4040,3690 4075,3725 4105.96,3725 4260.96,3570 4410,3570 4421.8,3558.2 U7.22@4421.8,3556.8 ; v1(4409.4,3473.08) 4421.8,3485.48 U7.22@4421.8,3523.36 U7.22@4421.8,3556.8 ; U7.24@4472.99,3523.36 U7.24@4472.99,3557.01 ; U7.26@4524.17,3523.36 4525,3524.19 4525,3560 4515,3570 4485,3570 4472.99,3557.99 U7.24@4472.99,3557.01 ; U7.22@4421.8,3556.8 4435,3570 4460,3570 U7.24@4472.99,3557.01
  Bottom Layer w12: U1.25@4013.25,3615.13 4040,3641.88 v1(4040,3680)
DRV_FAULT: R11.1 U1.32 U7.18 | length 692.9
  Top Layer w10: U7.18@4319.44,3523.36 4319.44,3495.56 4343.89,3471.11 v1(4353.5,3471.11)
  Top Layer w12: v1(4086.57,3701.03) 4103.97,3701.03 4185.39,3619.61 v1(4185.39,3578.98)
  Bottom Layer w12: U1.32@3915.81,3712.57 3943.24,3740 4026.99,3740 4065.96,3701.03 v1(4086.57,3701.03) ; v1(4185.39,3578.98) 4185.39,3549.61 4250,3485 4290,3485 4304.66,3470.34 R11.1@4304.66,3450
  Bottom Layer w20: R11.1@4310.4,3460 4321.51,3471.11 v1(4353.5,3471.11)
DRV_IN1: U1.40 U7.27 | length 968.2
  Top Layer w12: v1(4140,3725) 4208.07,3656.93 v1(4251.13,3656.93)
  Top Layer w20: v1(4509.01,3456.93) 4521.93,3456.93 4549.76,3484.76 U7.27@4549.76,3523.36 4549.76,3550.98 U7.27@4550,3550.98
  Bottom Layer w12: U1.40@3901.89,3893.52 4070.41,3725 v1(4140,3725) ; v1@4251.18,3656.89 4251.18,3568.82 4275,3545 4437.91,3545 4509.01,3473.91 v1(4509.01,3456.93)
DRV_IN2: U1.18 U7.25 | length 555.6
  Top Layer w20: v1(4470.82,3459.3) 4498.58,3487.06 U7.25@4498.58,3496.55 ; U7.25@4498.48,3496.45 U7.25@4498.58,3496.55 ; U7.25@4498.58,3549.98 U7.25@4498.58,3523.36 U7.25@4498.58,3496.55 ; U7.25@4498.68,3496.65 U7.25@4498.58,3496.55
  Bottom Layer w12: U1.18@4180.27,3698.64 4180.27,3695.3 4230,3645.57 4230,3560 4265,3525 4424.5,3525 4470.82,3478.68 v1(4470.82,3459.3)
DRV_IN3: U1.19 U7.23 | length 499.5
  Top Layer w20: v1(4442.87,3472.68) 4447.4,3477.22 U7.23@4447.4,3523.36 U7.23@4447.4,3549.98
  Bottom Layer w12: U1.19@4166.36,3684.73 4166.36,3681.37 4210.18,3637.54 4210.18,3549.82 4255,3505 4415,3505 4442.87,3477.13 v1(4442.87,3472.68)
DRV_OUT_1: CN6.1 R12.1 U8.3 | length 510.5
  Top Layer w50: v1(4801.06,3711.52) 4805.93,3716.38 v7(4897.59,3716.38)
  Bottom Layer w20: R12.1@4625,3654.37 4651.57,3627.8 U8.3@4709.76,3627.8
  Bottom Layer w29.53: R12.1@4625,3654.37 4625,3685 4656.38,3716.38 v7(4897.59,3716.38)
  other v1: 4750.58,3711.52 4844.54,3711.52
DRV_OUT_1_CS: R12.2 U7.5 U8.2 | length 398.7
  Bottom Layer w20: R12.2@4625,3575.63 4651.58,3602.21 U8.2@4709.76,3602.21
  Bottom Layer w29.53: v6(4469.98,3793.38) 4470.2,3793.38 4565,3698.58 4565,3600 4589.37,3575.63 R12.2@4625,3575.63
DRV_OUT_2: CN6.2 U7.8 | length 730.9
  Top Layer w50: CN6.2@4801.06,3790.26 4801.71,3789.61 v7(4951.92,3789.61)
  Bottom Layer w29.53: v6(4403.43,3794.81) 4438.62,3830 4580,3830 4620.39,3789.61 v7(4951.92,3789.61)
  other v1: 4744.47,3785 4795.69,3785 4838.43,3785 4890,3785
DRV_OUT_3: CN6.3 R13.1 U9.3 | length 572.7
  Top Layer w50: CN6.3@4801.06,3869 4805.06,3865 v1(4838.43,3865) v7(4890,3865)
  Bottom Layer w20: R13.1@4625,4004.37 4651.57,3977.8 U9.3@4709.76,3977.8
  Bottom Layer w29.53: R13.1@4625,4004.37 4629.81,4004.37 4659.34,4033.9 4782.86,4033.9 4825,3991.76 4825,3925 4885,3865 v7(4890,3865)
  other v1: 4750.92,3865 4797.73,3865
DRV_OUT_3_CS: R13.2 U7.9 U9.2 | length 419
  Bottom Layer w20: R13.2@4625,3925.63 4651.58,3952.21 U9.2@4709.76,3952.21
  Bottom Layer w29.53: v6(4369.64,3792.76) 4369.64,3814.64 4425,3870 4569.37,3870 R13.2@4625,3925.63
ENC_A: CN7.3 U1.4 | length 1517.9
  Top Layer w20: CN7.3@4912.4,4180.26 4913.41,4181.26 v1(4960,4181.26)
  Bottom Layer w10: U1.4@4138.52,3963.11 4111.08,3935.67 4084.33,3935.67 4050,3970 4050,3970.18 4046.68,3973.5 4046.68,4171.68 4195,4320 4955,4320 5010,4265 5010,4230 4961.26,4181.26 v1(4960,4181.26)
ENC_B: CN7.4 U1.3 | length 1374.9
  Top Layer w20: CN7.4@4912.4,4219.63 4913.41,4220.63 v1(4960,4220.63)
  Bottom Layer w10: U1.3@4124.59,3977.03 4102.56,3955 4085,3955 4060.68,3979.32 4060.68,4160.68 4205,4305 4950,4305 4990,4265 4990,4250.63 v1(4960,4220.63)
ENC_Z: CN7.5 U1.2 | length 1200.3
  Top Layer w20: CN7.5@4912.4,4259 4913.41,4260 v1(4960,4260)
  Bottom Layer w10: U1.2@4110.68,3990.95 4134.66,4014.93 4134.66,4024.93 4074.68,4084.91 4074.68,4149.68 4215,4290 4935,4290 4960,4265 v1(4960,4260)
GND: C1.1 C2.1 C3.1 C4.1 C7.1 C9.2 C10.2 C11.1 C12.1 C14.1 C15.1 C17.2 C18.1 C19.2 C20.1 C25.1 C26.1 C27.1 C31.1 C32.2 C33.1 CN1.1 CN1.3 CN1.4 CN2.3 CN2.4 CN2.5 CN3.3 CN3.4 CN3.5 CN4.3 CN4.4 CN5.3 CN5.4 CN6.4 CN6.5 CN7.2 CN7.6 CN7.7 CN8.2 CN8.6 CN8.7 CN9.2 CN9.6 CN9.7 CN10.2 CN10.5 CN10.6 CN11.2 CN11.5 CN11.6 H1.4 H2.2 LED1.1 LED2.1 R2.1 R6.1 R9.1 SW1.2 SW2.2 U1.20 U1.23 U1.35 U1.44 U1.47 U2.2 U3.1 U6.2 U7.6 U7.7 U7.10 U7.12 U7.13 U7.14 U7.19 U7.20 U7.28 U7.29 U10.1 | length 2301.8
  Top Layer w10: v9(3995.62,3554.57) 4084.99,3554.57 v1(4085.78,3553.79) ; v8(4157.43,3588.04) 4157.43,3572.57 4200,3530 4205,3530 ; C27.1@4312.56,3450 4322.56,3440 4355,3440 4371.54,3456.54 v1(4384.21,3456.54) ; U7.20@4370.62,3523.36 4370.62,3496.03 4386.39,3480.26 4386.39,3460 4396.39,3450 4435,3450 4459.4,3425.6 CN3.3@4459.4,3414.64
  Top Layer w12: 5080,4340 5085.78,4334.22 v1(5085.78,4308.11) ; 5089.25,4334.52 cw(c5038.03,4301.52) 5095,4323.13 CN7.6@5095,4320
  Top Layer w20: v2(3755,3610) 3785.51,3579.49 U6.2@3823.5,3579.49 ; C10.2@3883.02,4188.68 3931.81,4139.89 v1(3979,4139.89) ; v1(3965.31,4171.5) 3979,4157.8 v1(3979,4139.89) ; C12.1@4057.48,4112.45 4030.03,4139.89 v1(3979,4139.89) ; 4150,3780 4170.7,3759.3 C25.1@4197.2,3759.3 ; 4160,3755 4185,3730 4190,3730 ; U7.12@4293.85,3749.01 4293.85,3695 4352.67,3636.18 v1(4374.55,3636.18) U7.29@4409.01,3636.18 ; R6.1@4328.43,3992.37 4385.39,3992.37 v15(4409.01,4015.99) ; C20.1@4606.18,4324.69 4621.21,4309.66 v1(4621.21,4264.81) 4663.39,4306.98 CN2.4@4663.39,4325.7 ; 4705,3715 4705,3685.36 4736.17,3654.18 C31.1@4736.17,3652.21
  Bottom Layer w10: U1.44@3957.57,3949.19 3980,3926.76 3980,3900 ; v9(3995.62,3554.57) 4060,3618.95 4060,3640 4070,3650 4089.73,3650 U1.23@4110.68,3629.05 4110.68,3624.32 4146.96,3588.04 v8(4157.43,3588.04) ; U1.47@3999.32,3990.95 4004.05,3990.95 4050,3945 4050,3925 4085,3890 ; v1(4085,3425) 4085.78,3425.78 v1(4085.78,3553.79)
  Bottom Layer w12: v2@3610,3580 3620,3590 3735,3590 v2(3755,3610) ; U1.20@4152.43,3670.81 4185,3638.24 4185,3615 4184.4,3615 v8(4157.43,3588.04)
  Bottom Layer w20: C32.2@4229.49,4254.49 C33.1@4279.49,4204.49
  other v1: 4955,3245 4719.36,3265.94 4034.99,3369.53 4865,3370 5035,3435 4609.4,3470.71 3910,3785 4105,3800 4050,3825 3985,3875 4120,4130 3877.29,4138.68 4310.11,4195.9 4535,4200 4256.58,4221.41 5055,4255 5022.46,4308.21 5054.14,4308.21 5067.67,4344.33 5003.89,4356.15
  other v2: 4333.42,3271.83 4140.93,3276.84 5049.37,3277.02 4235.48,3277.92 4510,3280 4591.41,3283.11 4847.31,3283.47 3325,3290 3531.7,3290 3624.16,3290 3830,3290 3932.06,3292.97 4030,3295 3600,3575 4329.48,3616.78 4410,3635 4450,3635 4330,3655 4375,3685 4411.9,3685 3211.14,3744.31 3537.36,3751.78 3470.5,4105.26 3590,4110
  other v3: 4417.32,3236.22 4535.43,3236.22 4653.54,3236.22 4771.65,3236.22 4889.76,3236.22 5007.87,3236.22 3354.33,3354.33 3472.44,3354.33 3590.55,3354.33 3708.66,3354.33 3826.77,3354.33 5007.87,3354.33 5007.87,3472.44 3236.22,3826.77 3590.55,3826.77 3236.22,3944.88 3590.55,3944.88 3236.22,4062.99 3354.33,4062.99 3236.22,4181.1 3354.33,4181.1 3472.44,4181.1 3590.55,4181.1 3354.33,4299.21 3472.44,4299.21 3590.55,4299.21
  other v4: 4297.2,4341.58 4589.32,4341.58 4703.89,4341.58 4799.17,4341.58 4880.27,4341.58 4927.9,4341.58
  other v8: 4297.59,3387.64
  other v9: 4404.68,3367.57
  other v10: 4680,3370
  other v11: 3341.29,3524.26
I2C1_SCL: H2.3 U1.42 | length 425.4
  Bottom Layer w12: U1.42@3929.73,3921.36 3901.29,3949.79 3901.29,4216.29 3935,4250 3935,4318.53 H2.3@3933.27,4320.26
I2C1_SDA: H2.4 U1.43 | length 441.7
  Bottom Layer w12: U1.43@3943.64,3935.27 3920,3958.92 3920,4206.99 H2.4@4033.27,4320.26
I2C2_SCL: CN10.3 U1.21 | length 556.8
  Top Layer w10: v1(3900.35,3625.04) 3970.04,3625.04 4000,3655 4053.93,3655 v1(4072.39,3673.47)
  Top Layer w20: v1(3745,3450) 3745.24,3449.76 CN10.3@3745.24,3415.7
  Bottom Layer w10: v1(3745,3450) 3745,3485 3885.04,3625.04 v1(3900.35,3625.04) ; v1(4072.39,3673.47) 4073.93,3675 4095,3675 4104.33,3684.33 4111.08,3684.33 U1.21@4138.52,3656.89
I2C2_SDA: CN10.4 U1.22 | length 535.8
  Top Layer w10: v1(3901.92,3590.79) 3916.13,3605 4140.54,3605 v13(4152.32,3616.78)
  Top Layer w20: CN10.4@3784.61,3415.7 3784.61,3449.61 v1(3785,3450)
  Bottom Layer w10: v1(3785,3450) 3785,3495 3880.79,3590.79 v1(3901.92,3590.79) ; U1.22@4124.59,3642.97 4126.13,3642.97 v13(4152.32,3616.78)
KEY: C31.2 R18.2 SW2.1 U1.38 | length 2982.8
  Top Layer w12: v1(4572.79,3397.88) 4651.39,3476.48 SW2.1@4651.39,3521.5 4681.05,3551.17 C31.2@4681.05,3652.21
  Bottom Layer w12: U1.38@3874.05,3865.68 3874.05,3865.95 3845,3895 3555,3895 3315,3655 3205,3655 3166.08,3616.08 3166.08,3277.89 ccw(c3227.01,3277.89) 3166.14,3275.27 ccw(c3227.01,3277.89) 3166.22,3273.78 3220,3220 4343.9,3220 R18.2@4521.78,3397.88 ; R18.2@4519.66,3400 R18.2@4521.78,3397.88 ; v1(4572.79,3397.88) R18.2@4521.78,3397.88
LED: R17.1 U1.33 | length 295.7
  Bottom Layer w12: v1(3675,3565) 3743.75,3565 3901.89,3723.14 U1.33@3901.89,3726.48
NRST: C7.2 R3.2 SW1.1 U1.7 | length 620.1
  Top Layer w10: v4(4214.91,3958.9) 4216.01,3960 4495,3960 4550,4015 SW1.1@4554.83,4015 ; R3.2@4501.61,4068.22 SW1.1@4554.83,4015 ; SW1.1@4555.56,4015 SW1.1@4554.83,4015
  Top Layer w12: SW1.1@4555.56,4015 4610,3960.56 4610,3960 4613.71,3956.29 C7.2@4613.71,3910
  Bottom Layer w10: U1.7@4180.27,3921.36 4180.27,3924.26 v4(4214.91,3958.9)
OSC_IN: U1.5 X1.3 | length 213.3
  Bottom Layer w12: U1.5@4152.43,3949.19 4175,3971.76 4175,3990 4150.15,4014.85 4150.15,4030.15 4185.81,4065.81 X1.3@4185.81,4128.06
OSC_OUT: U1.6 X1.1 | length 96.1
  Bottom Layer w10: U1.6@4166.36,3935.27 4190,3958.92 4190,4009.75 X1.1@4198.34,4018.09
PWM_AUX1: CN2.1 D3.2 U1.39 | length 1916.4
  Top Layer w12: CN2.1@4789.37,4164.3 4789.37,4204.37 4900.99,4315.99 v8(4991.29,4315.99)
  Bottom Layer w10: D3.2@3861.69,4215.45 3880,4233.76 3880,4338.45 3904.79,4363.23 4944.05,4363.23 v8(4991.29,4315.99)
  Bottom Layer w12: D3.2@3861.69,4215.45 3850,4203.76 3850,3917.56 U1.39@3887.97,3879.59
PWM_AUX2: CN3.1 D4.2 U1.29 | length 926.6
  Top Layer w12: v1@3880,3465 v1(3880,3460) 3880,3395 3930,3345 4082.98,3345 4117.98,3310 4296.89,3310 v1(4301.13,3305.75)
  Top Layer w20: v1(4375,3375) 4380.63,3380.63 CN3.1@4380.63,3415.7
  Bottom Layer w10: v1(3880,3460) 3880,3525 3925,3570 3925,3638.24 U1.29@3957.57,3670.81
  Bottom Layer w20: v1(4301.13,3305.75) 4343.31,3347.93 D4.2@4343.31,3365 4365,3365 v1(4375,3375)
SENSE_1: U1.12 U8.8 | length 894.5
  Bottom Layer w10: U1.12@4249.87,3851.75 4268.25,3851.75 4355,3765 4455,3765 4535,3685 4535,3590 4590,3535 4835,3535 4876.61,3576.61 U8.8@4940.24,3576.61
SENSE_3: U1.13 U9.8 | length 1326
  Top Layer w12: v1@4935,3535 4935,3645 5015,3725 5015,3845 v1(4955,3905)
  Bottom Layer w12: U1.13@4249.87,3768.25 4288.12,3730 4435,3730 4504,3661 4504,3571 4580,3495 4855,3495 4895,3535 4928.58,3535 v1(4934.99,3528.59)
  Bottom Layer w20: U9.8@4940.24,3926.61 4955,3911.85 v1(4955,3905)
SENSE_BAT: C30.2 D2.1 R14.1 R15.2 U1.10 | length 658.8
  Top Layer w12: v1(4333.02,3936.86) 4340.18,3944.01 4514.01,3944.01 v1(4540,3970)
  Bottom Layer w10: U1.10@4222.03,3879.59 4242.44,3900 4296.17,3900 v1(4333.02,3936.86)
  Bottom Layer w12: R14.1@4540,4004.37 4540,4019.52 C30.2@4610.58,4090.11
  Bottom Layer w20: v1(4540,3970) R14.1@4540,4004.37 ; C30.2@4610.58,4090.11 R15.2@4680.23,4090.11 ; D2.1@4645.63,4160 4645.63,4124.71 R15.2@4680.23,4090.11 ; R15.2@4680.34,4090 R15.2@4680.23,4090.11
SPI1_MISO: CN8.4 U1.16 | length 987.1
  Top Layer w20: CN8.4@4912.4,3439.63 4959.41,3439.63 v1(4959.79,3440.01)
  Bottom Layer w10: U1.16@4208.11,3726.48 4239.59,3695 4260,3695 4260.98,3694.02 4268.77,3694.02 4288.16,3674.63 4288.16,3591.84 4305,3575 4450,3575 4610,3415 4930,3415 4955.01,3440.01 v1(4959.79,3440.01)
SPI1_MOSI: CN8.3 U1.17 | length 994
  Top Layer w12: CN8.3@4913.24,3401.07 4958.93,3401.07 v1(4960,3400)
  Bottom Layer w10: U1.17@4194.19,3712.57 4226.76,3680 4262.97,3680 4274.14,3668.83 4274.14,3580.86 4294.98,3560.02 4444.11,3560.02 4604.13,3400 v1(4960,3400)
SPI1_SCK: CN8.5 U1.15 | length 983.9
  Top Layer w20: CN8.5@4912.4,3479 4959.41,3479 v1(4959.79,3479.38)
  Bottom Layer w10: U1.15@4222.03,3740.41 4249.47,3712.97 4272.03,3712.97 4305,3680 4305,3600 4315,3590 4456.65,3590 4616.65,3430 4915,3430 4959.79,3474.79 v1(4959.79,3479.38)
SPI2_MISO: CN9.4 U1.27 | length 1129.2
  Top Layer w10: v1(3981.06,3470.32) 3996.38,3455 4105,3455 4115,3445 4115,3375 4142.91,3347.09 4332.91,3347.09 4350.23,3329.77 4734.2,3329.77 4759.4,3354.97 4759.4,3399.17 CN9.4@4758.73,3399.85
  Bottom Layer w10: v1(3981.06,3470.32) 3981.06,3478.96 3955.02,3505 3955.02,3612.58 U1.27@3985.41,3642.97
SPI2_MOSI: CN9.3 U1.28 | length 1170.6
  Top Layer w10: v1(3950.35,3459.69) 3950.35,3476.7 3975.33,3501.68 4083.32,3501.68 4135,3450 4135,3385 4155,3365 4340,3365 4359.68,3345.32 4709.36,3345.32 4719.36,3355.32 CN9.3@4719.36,3399.85
  Top Layer w20: CN9.3@4719.36,3400.86 4719.36,3399.85 CN9.3@4725,3394.21
  Bottom Layer w10: v1(3950.35,3459.69) 3941,3469.04 3941,3626.41 U1.28@3971.48,3656.89
SPI2_SCK: CN9.5 U1.26 | length 1117.8
  Top Layer w10: v1(4029.09,3419.93) 4040.07,3419.93 4130,3330 4325,3330 4340,3315 4757.62,3315 4798.1,3355.47 CN9.5@4798.1,3399.85
  Bottom Layer w10: U1.26@3999.32,3629.05 3971.89,3601.62 3971.89,3518.11 4029.09,3460.91 v1(4029.09,3419.93)
SWCLK: H1.3 U1.37 | length 981.3
  Bottom Layer w10: H1.3@3230,3385 3185,3430 3185,3505 3215,3535 3270,3535 3390,3655 3690,3655 3870.13,3835.13 3870.13,3841.75 U1.37@3860.13,3851.75
SWDIO: H1.2 U1.34 | length 763.8
  Bottom Layer w12: H1.2@3230,3485 3246.97,3485 3400.98,3639.01 3786.57,3639.01 U1.34@3887.97,3740.41
TPS_EN: R5.1 R6.2 U3.5 | length 186
  Top Layer w10: U3.5@4235.24,4083.23 4218.82,4083.23 4200,4064.41 4200,4000 4210,3990 4265.61,3990 R6.2@4271.87,3983.75
TPS_SW: C13.1 L1.1 U3.2 | length 415.2
  Top Layer w15: C13.1@4057.73,4193.87 4091.6,4160 4160,4160 4190,4130 4190,4100 4176.17,4086.17 U3.2@4144.87,4086.17
  Top Layer w25: C13.1@4057.73,4193.87 4057.73,4224.67 4098.06,4265 4181.5,4265 L1.1@4184.54,4268.04
UART1_RX: CN11.4 U1.31 | length 585
  Top Layer w20: v1(3485,3455) 3485.24,3454.76 CN11.4@3485.24,3415.7
  Bottom Layer w12: v1(3485,3455) 3495,3455 3580,3540 3742.47,3540 3872.47,3670 3901.08,3670 U1.31@3929.73,3698.64
UART1_TX: CN11.3 U1.30 | length 654.2
  Top Layer w20: v1(3445,3455) 3445.87,3454.13 CN11.3@3445.87,3415.7
  Bottom Layer w12: v1(3445,3455) 3470,3430 3505,3430 3595,3520 3750,3520 3880,3650 3908.92,3650 U1.30@3943.64,3684.73